# Altium PCB STM32WLE5CBU6 dev board.PcbDoc (part 1 of 2)
Units mm, origin at the board's own origin, x right, y up, seen from the top; angles counter-clockwise.
Board outline 20 x 45 mm, 2 copper layers (Top Layer, Bottom Layer), stack 1.569 mm thick; 116 components, 89 nets, 404 pads, 3 vias.
Unrouted connection lines stored in the file: 306.
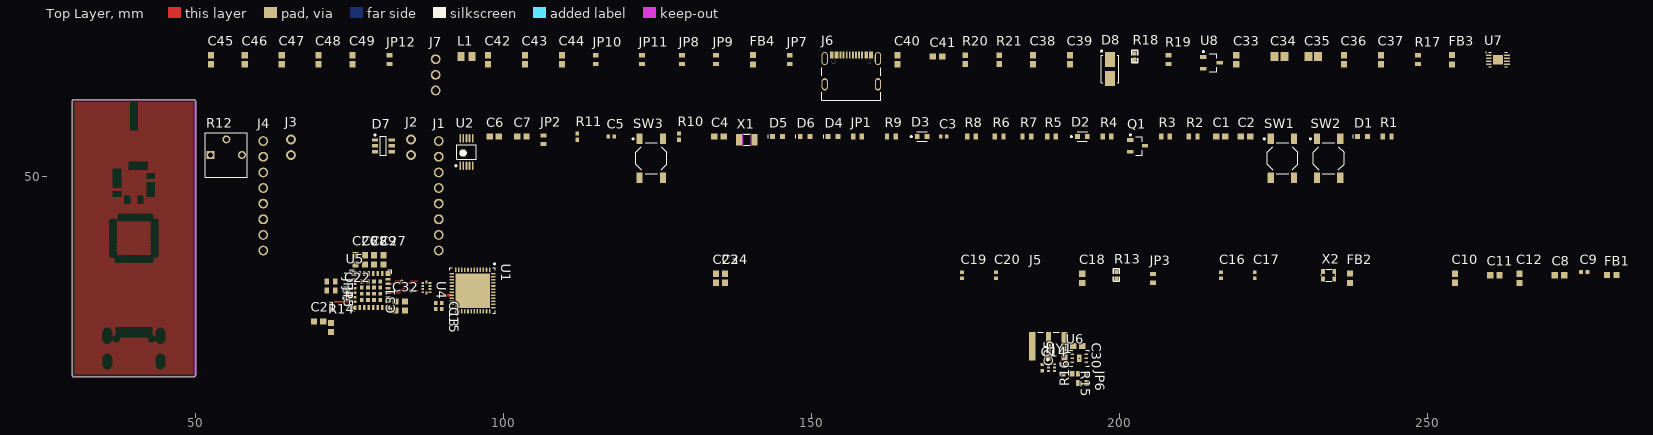
[diagram p0: Top Layer view]
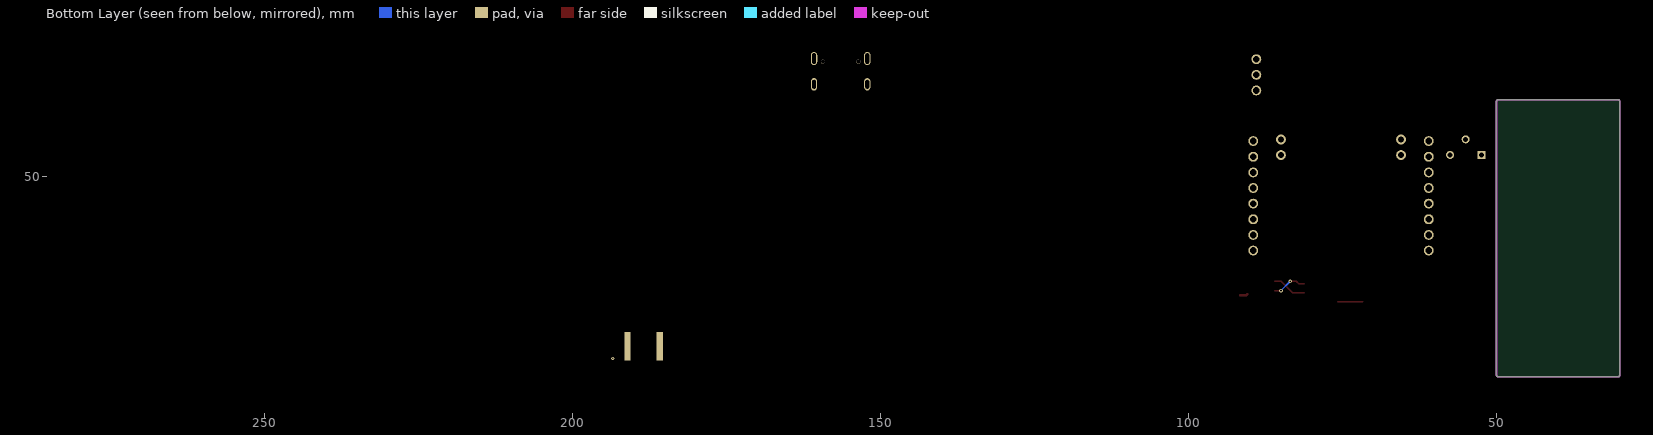
[diagram p1: Bottom Layer view, seen from below]

## Layer stack, top to bottom
Top Solder: solder mask 0.0254, Polyester, Dk 4
Top Layer: signal copper 0.035
Dielectric 1: core 1.4986, FR-4, Dk 4.3
Bottom Layer: signal copper 0.035
Bottom Solder: solder mask 0.0254, Polyester, Dk 4

## Board outline
30,17.754 30,62.246 cw(c30.254,62.246) 30.254,62.5 49.746,62.5 cw(c49.746,62.246) 50,62.246 50,17.754 cw(c49.746,17.754) 49.746,17.5 30.254,17.5 cw(c30.254,17.754)

## Design rules (kind name [scope] priority, off if disabled: settings)
Clearance [All] p1: gap=0.254 ignorepadtopadclearanceinfootprint=FALSE except(0: Arc-Hole Track-Hole SMDPad-Hole THPad-Hole Via-Hole Fill-Hole Poly-Hole Region-Hole Text-Hole)
DiffPairsRouting [All] p1: maxlimit=0.254 minlimit=0.254 mostfreqgap=0.254 toplayer_minwidth=0.381 toplayer_maxwidth=0.381 toplayer_prefwidth=0.381 bottomlayer_minwidth=0.381 bottomlayer_maxwidth=0.381 bottomlayer_prefwidth=0.381 maxuncoupledlength=12.7
HoleSize [All] p1: absolutevalues=TRUE maxlimit=6.3 minlimit=0.2 maxpercent=80.000 minpercent=20.000
PlaneConnect [All] p1: planeconnectstyle=Direct reliefexpansion=0.508 reliefentries=4 reliefconductorwidth=0.254 reliefairgap=0.254
PolygonConnect [All] p1: connectstyle=Direct reliefconductorwidth=0.254 reliefentries=4 polygonreliefangle="90 Angle" airgapwidth=0.254
RoutingVias [All] p1: holewidth=0.2 width=0.45 viastyle="Through Hole" minholewidth=0.2 minwidth=0.45 maxholewidth=0.711 maxwidth=1.27
SolderMaskExpansion [All] p1: expansion=0.102 istentingtop=FALSE
Width [All] p1: maxlimit=0.254 minlimit=0.127 preferedwidth=0.254
27 further rules are at their usual default settings.

## Classes and differential pairs
component class "USB & power": C33 C34 C35 C36 C37 C38 C39 C40 C41 C42 C43 C44 C45 C46 C47 C48 C49 D8 FB3 FB4 J6 J7 JP7 JP8 JP9 JP10 JP11 JP12 L1 R17 R18 R19 R20 R21 U7 U8
component class "STM32WLE5CBU6 dev board": C1 C2 C3 C4 C5 C6 C7 D1 D2 D3 D4 D5 D6 D7 J1 J2 J3 J4 JP1 JP2 Q1 R1 R2 R3 R4 R5 R6 R7 R8 R9 R10 R11 R12 SW1 SW2 SW3 U1 U2 X1
component class "RF frontend": C8 C9 C10 C11 C12 C13 C14 C15 C16 C17 C18 C19 C20 C21 C22 C23 C24 C25 C26 C27 C28 C29 C30 C31 C32 FB1 FB2 HY1 J5 JP3 JP4 JP5 JP6 R13 R14 R15 R16 U4 U5 U6 X2
differential pair RFI: +RFI_P -RFI_N

## Components (designator, comment, footprint, x,y, rotation, side; value= is the part's Value field where it differs from the comment)
C1 "C0603C104M5RACTU" CAPC1608X10N#1 216.5,56.5 r0 top value=100nF
C2 "C0603C104M5RACTU" CAPC1608X10N#1 220.5,56.5 r0 top value=100nF
C3 "GRM1555C1H150JA01D" CAPC1005X05N 171.5,56.5 r0 top value=15pF
C4 "C0603C104M5RACTU" CAPC1608X10N#1 135,56.5 r0 top value=100nF
C5 "GRM1555C1H150JA01D" CAPC1005X05N 117.5,56.5 r0 top value=15pF
C6 "C0603C104M5RACTU" CAPC1608X10N#1 98.5,56.5 r0 top value=100nF
C7 "C0603C104M5RACTU" CAPC1608X10N#1 103,56.5 r0 top value=100nF
C8 "CL10B473KB8NNNC" CAPC1608X10N#1 271.499,34 r0 top value=47nF
C9 "CL05C680JB5NNNC" CAPC1005X06N 275.499,34.5 r0 top value=68pF
C10 "C0603C103J5RACTU" CAPC1608X10N#1 254.499,33.5 r90 top value=10nF
C11 "CC0603CRNPO0BN1R0" CAPC1608X10N#2 260.999,34 r0 top value=1pF
C12 "CC0603CRNPO0BN1R0" CAPC1608X10N#2 264.999,33.5 r90 top value=1pF
C13 "C0402C101J5GAC7411" CAPC1005X05N 89.5,29.5 r0 top value=100pF
C14 "C0402C101J5GAC7411" CAPC1005X05N 187.5,19 r90 top value=100pF
C15 "C0402C101J5GAC7411" CAPC1005X05N 89.5,28.5 r0 top value=100pF
C16 "C0402C101J5GAC7411" CAPC1005X05N 216.5,34 r90 top value=100pF
C17 "C0402C101J5GAC7411" CAPC1005X05N 222,34 r90 top value=100pF
C18 "GRM1885C1H100JA01D" CAPC1608X10N#2 194,33.5 r90 top value=10pF
C19 "GCM1555C1H1R0JA16D" CAPC1005X05N 174.5,34 r90 top value=1pF
C20 "GCM1555C1H1R0JA16D" CAPC1005X05N 180,34 r90 top value=1pF
C21 "C0603C102K5RAC" CAPC1608X10N#2 70,26.5 r0 top value=1nF
C22 "0402B682K500NT" CAPC1005X06N 74.5,31 r90 top value=6.8nF
C23 "C0603C104M5RACTU" CAPC1608X10N#1 134.5,33.5 r90 top value=100nF
C24 "C0603C104M5RACTU" CAPC1608X10N#1 136,33.5 r90 top value=100nF
C25 "C0402C101J5GAC7411" CAPC1005X05N 191,19.5 r180 top value=100pF
C26 "CL10B473KB8NNNC" CAPC1608X10N#1 76,36.5 r90 top value=47nF
C27 "0603B472K500NT" CAPC1608X10N#2 80.5,36.5 r90 top value=4.7nF
C28 "C0603C471J1RACTU" CAPC1608X10N#2 77.5,36.5 r90 top value=470pF
C29 "CL10B221KB8NNNC" CAPC1608X10N#2 79,36.5 r90 top value=220pF
C30 "C0603C104M5RACTU" CAPC1608X10N#1 193.25,22.5 r0 top value=100nF
C31 "C0603C471J1RACTU" CAPC1608X10N#2 84,29 r90 top value=470pF
C32 "CL10B221KB8NNNC" CAPC1608X10N#2 82.5,29 r90 top value=220pF
C33 "C0603C104M5RACTU" CAPC1608X10N#1 219,69 r90 top value=100nF
C34 "C0805C106K8PACTU" CAPC2012X14N 226,69.5 r0 top value=10uF
C35 "C0805C106K8PACTU" CAPC2012X14N 231.5,69.5 r0 top value=10uF
C36 "C0603C105K4RACTU" CAPC1608X10N#1 236.5,69 r90 top value=1uF
C37 "C0603C105K4RACTU" CAPC1608X10N#1 242.5,69 r90 top value=1uF
C38 "C0603C475K9PACTU" CAPC1608X10N#1 186,69 r90 top value=4.7uF
C39 "C0603C104M5RACTU" CAPC1608X10N#1 192,69 r90 top value=100nF
C40 "C0603C104M5RACTU" CAPC1608X10N#1 164,69 r90 top value=100nF
C41 "C0603C475K9PACTU" CAPC1608X10N#1 170.5,69.5 r0 top value=4.7uF
C42 "C0603C475K9PACTU" CAPC1608X10N#1 97.5,69 r90 top value=4.7uF
C43 "C0603C104M5RACTU" CAPC1608X10N#1 103.5,69 r90 top value=100nF
C44 "C0603C103J5RACTU" CAPC1608X10N#1 109.5,69 r90 top value=10nF
C45 "C0603C475K9PACTU" CAPC1608X10N#1 52.5,69 r90 top value=4.7uF
C46 "C0603C104M5RACTU" CAPC1608X10N#1 58,69 r90 top value=100nF
C47 "C0603C104M5RACTU" CAPC1608X10N#1 64,69 r90 top value=100nF
C48 "C0603C104M5RACTU" CAPC1608X10N#1 70,69 r90 top value=100nF
C49 "CL10B474KA8NNNC" CAPC1608X10N#1 75.5,69 r90 top value=470nF
D1 "150060RS75000" 0603_A 239.5,56.5 r0 top
D2 "LTST-C191TBKT" FP-150060GS75000-MFG 194,56.5 r0 top
D3 "150060GS75000" FP-150060GS75000-MFG 168,56.5 r0 top
D4 "150060RS75000" 0603_A 153.5,56.5 r0 top
D5 "150060RS75000" 0603_A 144.5,56.5 r0 top
D6 "150060RS75000" 0603_A 149,56.5 r0 top
D7 "SRV05-4-P-T7" SOT95P280X145-6N 80.5,55 r0 top value=3.5pF
D8 "SS54" DIOM4226X20N 198.5,67.5 r90 top
FB1 "PE-0603PFB121ST" INDC1608X10N 279.999,34 r0 top value=120R
FB2 "PE-0603PFB121ST" INDC1608X10N 237.5,33.5 r90 top value=120R
FB3 "PE-0603PFB121ST" INDC1608X10N 253.999,69 r90 top value=120R
FB4 "PE-0603PFB121ST" INDC1608X10N 140.5,69 r90 top value=120R
HY1 "HHM22139A2" SOTFL55P150X70-6N 189,19 r0 top
J1 "22-28-4080" 22-28-4080-Footprint-1 89.5,38 r90 top
J2 "22-28-4020" 22-28-4020-Footprint-1 85,53.5 r90 top
J3 "22-28-4020" 22-28-4020-Footprint-1 65.5,53.5 r90 top
J4 "22-28-4080" 22-28-4080-Footprint-1 61,38 r90 top
J5 "EMPCB.SMAFSTJ.B.HT" FP-EMPCB_SMAFSTJ_B_HT-MFG 188.5,29.5 r0 top
J6 "USB4105-GF-A" GCT_USB4105-GF-A 156.5,65 r0 top
J7 "10129378-903001BLF" 10129378-903001BLF-Footprint-1 89,64 r90 top
JP1 "RC0603FR-070RL" RESC1608X05N 157.5,56.5 r0 top
JP2 "RC0603FR-070RL" RESC1608X05N 106.5,56 r90 top
JP3 "RC0603FR-070RL" RESC1608X05N 205.5,33.5 r90 top
JP4 "RC0603FR-070RL" RESC1608X05N 72,33 r0 top
JP5 "RC0603FR-070RL" RESC1608X05N 72,31.5 r0 top
JP6 "RC0603FR-070RL" RESC1608X05N 194,18 r0 top
JP7 "RC0603FR-070RL" RESC1608X05N 146.5,69 r90 top
JP8 "RC0603FR-070RL" RESC1608X05N 129,69 r90 top
JP9 "RC0603FR-070RL" RESC1608X05N 134.5,69 r90 top
JP10 "RC0603FR-070RL" RESC1608X05N 115,69 r90 top
JP11 "RC0603FR-070RL" RESC1608X05N 122.5,69 r90 top
JP12 "RC0603FR-070RL" RESC1608X05N 81.5,69 r90 top
L1 "MLZ2012M150WT000" INDC2012X14N 94,69.5 r0 top value=15uH
Q1 "SI2301CDS-T1-GE3" SOT95P237X112-3N 203,55 r0 top
R1 "RC0603FR-071KL" RESC1608X05N 243.5,56.5 r0 top value=1k
R2 "RC0603FR-07100KL" RESC1608X05N 212,56.5 r0 top value=100k
R3 "CRCW060333R0FKEAC" RESC1608X05N 207.5,56.5 r0 top value=33R
R4 "CRCW06034K70FKEAC" RESC1608X05N 198,56.5 r0 top value=4.7kR
R5 "RC0603FR-071KL" RESC1608X05N 189,56.5 r0 top value=1k
R6 "RC0603FR-071KL" RESC1608X05N 180.5,56.5 r0 top value=1k
R7 "RC0603FR-071KL" RESC1608X05N 185,56.5 r0 top value=1k
R8 "RK73B1JTTD152J" RESC1608X05N 176,56.5 r0 top value=1.5k
R9 "RC0603FR-071KL" RESC1608X05N 163,56.5 r0 top value=1k
R10 "0402WGF220JTCE" RESC1005X04N 128.5,56.5 r90 top value=22R
R11 "0402WGF220JTCE" RESC1005X04N 112,56.5 r90 top value=22R
R12 "3362P-1-254LF" 3362P-1-502LF-Footprint-1 55,50 r0 top value=250k
R13 "0402WGF2200TCE" RESC1005X04N 199.5,34 r90 top value=220R
R14 "CRCW0603100RFKEAC" RESC1608X06N 72,25.5 r90 top value=100R
R15 "CRCW060310K0FKEA" RESC1608X06N 191.5,18 r0 top value=10k
R16 "RC0603FR-07100KL" RESC1608X05N 194,16.5 r180 top value=100k
R17 "ERJ3EKF4702V" RESC1608X05N 248.5,69 r90 top value=47k
R18 "ERJ-PA2J100X" RESC1005X04N 202.5,69.5 r90 top value=10R
R19 "CRCW06038K20JNEAC" RESC1608X05N 208,69 r90 top value=8k2
R20 "CRCW06035K10FKEA" RESC1608X06N 175,69 r90 top value=5.1k
R21 "CRCW06035K10FKEA" RESC1608X06N 180.5,69 r90 top value=5.1k
SW1 "TL3342F160QG" ESWI-TL3342F160QG_V 226.5,53 r0 top
SW2 "TL3342F160QG" ESWI-TL3342F160QG_V 234,53 r0 top
SW3 "TL3342F160QG" ESWI-TL3342F160QG_V 124,53 r0 top
U1 "STM32WLE5CBU6" QFN50P700X700X60_HS-49L 95,31.5 r270 top
U2 "CH340E" TSSOP50P490X110-10N 94,54 r90 top
U4 "3" 0900FM15K0039001E-Footprint-1 87.5,32 r270 top
U5 "SKY65313-21" QFN75P600X600X100_HS-25N 78.5,31.5 r0 top
U6 "LMV228SD/NOPB" NGF0006A_V 193.5,20.5 r0 top
U7 "AP7363-HA-7" SON50P300X63_HS-9M 261.499,69 r0 top
U8 "XC6206P332MR" SOT95P280X120-3N 215,68.5 r0 top
X1 "Q13FC1350000400" Q13FC1350000400-Footprint-1 139.5,56 r0 top value=32.768kHz
X2 "ECS-TXO-20CSMV4-320-AY-TR" ECS-TXO-20CSMV4-320-AY-TR-Footprint-1 234,34 r0 top

## Footprints (in the part's own frame and the unit in brackets; to place one, negate y for a bottom-side part, rotate by r counter-clockwise, add the part's x,y. Pads: shape width x height; smd on the part's side, far side on the other; paste and mask are expansions set on the pad)
22-28-4020-Footprint-1 [mm]
  round 1.6 hole 1: 1(0,0) 2(2.54,0)
  body extent -1.27,-1.27 3.81,1.23, height 8.38
22-28-4080-Footprint-1 [mm]
  round 1.6 hole 1.1: 1(0,0) 2(2.54,0) 3(5.08,0) 4(7.62,0) 5(10.16,0) 6(12.7,0) 7(15.24,0) 8(17.78,0)
  body extent -1.27,-1.24 19.05,1.24, height 7.24
0603_A [mm] "Chip LED, 2-Leads, Body 1.6x0.8mm, IPC Medium Density"
  rect 0.8x0.8 smd: 1(-0.8,0) 2(0.8,0)
  silkscreen extent -1.5,-0.3 -1.5,0.3, body extent -0.8,-0.4 0.8,0.4, height 0.7
0900FM15K0039001E-Footprint-1 [mm]
  rect 0.275x0.45 smd: 1(0.75,0.6) 2(0.25,0.6) 3(-0.25,0.6) 4(-0.75,0.6) 6(-0.75,-0.6) 7(-0.25,-0.6) 8(0.25,-0.6) 9(0.75,-0.6)
  rect 0.5x0.375 smd: 5(-0.9,0) 10(0.9,0)
  body extent -1,-0.63 1,0.63, height 0.81
3362P-1-502LF-Footprint-1 [mm]
  rect 1.3x1.3 hole 0.8: 1(-2.54,3.53)
  round 1.3 hole 0.8: 2(0,6.071) 3(2.54,3.53)
  silkscreen extent -3.4,-0.1 3.4,7.1, body extent -3.3,0 3.3,6.98, height 4.75
10129378-903001BLF-Footprint-1 [mm]
  round 1.6 hole 1.1: 1(0,0) 2(2.54,0) 3(5.08,0)
  body extent -1.27,-1.23 6.35,1.27, height 8.38
CAPC1005X05N [mm] "Chip Capacitor, 2-Leads, Body 1.00x0.50mm, IPC Medium Density"
  rect 0.54x0.64 smd: 1(-0.5,0) 2(0.5,0)
  body extent -0.5,-0.25 0.5,0.25, height 0.5
CAPC1005X06N [mm] "Chip Capacitor, 2-Leads, Body 1.00x0.50mm, IPC Medium Density"
  rect 0.66x0.62 smd: 1(-0.508,0) 2(0.508,0)
  body extent -0.53,-0.28 0.53,0.28, height 0.55
CAPC1608X10N#1 [mm] "Chip Capacitor, 2-Leads, Body 1.60x0.80mm, IPC Medium Density"
  rect 1.05x1 smd: 1(-0.75,0) 2(0.75,0)
  body extent -0.87,-0.48 0.87,0.48, height 0.95
CAPC1608X10N#2 [mm] "Chip Capacitor, 2-Leads, Body 1.60x0.80mm, IPC Medium Density"
  rect 1x1 smd: 1(-0.75,0) 2(0.75,0)
  body extent -0.87,-0.48 0.87,0.48, height 0.95
CAPC2012X14N [mm] "Chip Capacitor, 2-Leads, Body 2.00x1.25mm, IPC Medium Density"
  rect 1.3x1.45 smd: 1(-0.8,0) 2(0.8,0)
  body extent -1.1,-0.72 1.1,0.72, height 1.45
DIOM4226X20N [mm] "Molded Diode, 2-Leads, Body 4.25x2.55mm, IPC Medium Density"
  rect 2.4x1.6 smd: 1(-1.55,0) 2(1.55,0)
  silkscreen extent -2.25,-1.4 3.02,1.47, body extent -2.47,-1.4 2.47,1.4, height 1.98
ECS-TXO-20CSMV4-320-AY-TR-Footprint-1 [mm]
  rect 0.63x0.825 smd: 1(-0.91,-0.613) 2(0.91,-0.613) 3(0.91,0.613) 4(-0.91,0.613)
  silkscreen extent -1.17,-0.98 1.17,0.98, body extent -1,-0.8 1,0.8, height 0.8
ESWI-TL3342F160QG_V [mm] "SMD, 4-Leads, Body 5x5mm, Pitch 6.3mm"
  rect 1x1.7 smd: 1(-1.9,3.15) 2(-1.9,-3.15) 3(1.9,3.15) 4(1.9,-3.15)
  silkscreen extent -3.07,-2.5 2.5,3.27, body extent -2.5,-3.3 2.5,3.3, height 1.5
FP-150060GS75000-MFG [mm]
  rect 0.8x0.8 smd paste+0 mask+0: 1(-0.8,0) 2(0.8,0)
  silkscreen extent -1.9,-0.78 0.85,0.77, body extent -1.3,-0.55 1.3,0.55, height 0.25
FP-EMPCB_SMAFSTJ_B_HT-MFG [mm]
  rect 0.85x4.56 smd paste+0: 1(0,-7.03)
  rect 1x4.56 smd paste+0: 2(-2.62,-7.03) 3(2.62,-7.03)
  rect 1x4.56 smd far side paste+0 mask+0: 4(-2.62,-7.03) 5(2.62,-7.03)
  silkscreen extent -1.75,-4.75 1.75,-4.75, body extent -3.17,-8.45 3.22,4.85, height 3.55
GCT_USB4105-GF-A [mm]
  oval 1x2 hole 0.6 slot 1.4 at 90 deg: 0(-4.32,0) 0(4.32,0)
  oval 1.05x2.1 hole 0.6 slot 1.7 at 90 deg: 0(-4.32,4.18) 0(4.32,4.18)
  round 0.65 hole 0.65 unplated: 0(-2.89,3.68) 0(2.89,3.68)
  rect 0.3x1.15 smd: 1A(-3.35,4.755) 1B(3.05,4.755) 4A(-2.55,4.755) 4B(2.25,4.755) 5A(-1.25,4.755) 5B(1.75,4.755) 6A(-0.25,4.755) 6B(0.75,4.755) 7A(0.25,4.755) 7B(-0.75,4.755) 8A(1.25,4.755) 8B(-1.75,4.755) 9A(2.55,4.755) 9B(-2.25,4.755) 12A(3.35,4.755) 12B(-3.05,4.755)
  silkscreen extent -4.79,-2.6 4.79,2.65, body extent -4.79,-2.6 4.79,5.11, height 3.31
INDC1608X10N [mm] "Chip Inductor, 2-Leads, Body 1.60x0.80mm, IPC Medium Density"
  rect 0.97x0.98 smd: 1(-0.77,0) 2(0.77,0)
  body extent -0.87,-0.48 0.87,0.48, height 0.95
INDC2012X14N [mm] "Chip Inductor, 2-Leads, Body 2.00x1.25mm, IPC Medium Density"
  rect 1.11x1.47 smd: 1(-0.9,0) 2(0.9,0)
  body extent -1.1,-0.72 1.1,0.72, height 1.45
NGF0006A_V [mm] "SON, 6-Leads, Body 2.2x2.5mm, Pitch 0.65mm, NSC Recommended (SC-70 Land)"
  rrect40% 0.6x0.25 smd paste-0.125 mask+0.051: 1(-1.15,0.65) 2(-1.15,0) 3(-1.15,-0.65) 4(1.15,-0.65) 5(1.15,0) 6(1.15,0.65)
  rrect13% 0.75x1.2 smd paste-0.6 mask+0.051: 7(0,0)
  silkscreen extent -2.27,-1.3 1.6,1.45, body extent -1.3,-1.15 1.3,1.15, height 0.8
Q13FC1350000400-Footprint-1 [mm]
  rect 1x1.8 smd: 1(-1.25,0) 2(1.25,0)
  Top Layer keep-out region: -0.75,-0.9 0.75,-0.9 0.75,0.9 -0.75,0.9
  silkscreen extent -0.5,-0.9 0.5,0.9, body extent -1.6,-0.75 1.6,0.75, height 0.91
QFN50P700X700X60_HS-49L [mm] "QFN, 48-Leads, Body 7.00x7.00mm, Pitch 0.50mm, Thermal Pad 5.60x5.60mm, IPC High Density"
  oval 0.75x0.25 smd: 1(-3.375,2.75) 2(-3.375,2.25) 3(-3.375,1.75) 4(-3.375,1.25) 5(-3.375,0.75) 6(-3.375,0.25) 7(-3.375,-0.25) 8(-3.375,-0.75) 9(-3.375,-1.25) 10(-3.375,-1.75) 11(-3.375,-2.25) 12(-3.375,-2.75) 25(3.375,-2.75) 26(3.375,-2.25) 27(3.375,-1.75) 28(3.375,-1.25) 29(3.375,-0.75) 30(3.375,-0.25) 31(3.375,0.25) 32(3.375,0.75) 33(3.375,1.25) 34(3.375,1.75) 35(3.375,2.25) 36(3.375,2.75)
  oval 0.25x0.75 smd: 13(-2.75,-3.375) 14(-2.25,-3.375) 15(-1.75,-3.375) 16(-1.25,-3.375) 17(-0.75,-3.375) 18(-0.25,-3.375) 19(0.25,-3.375) 20(0.75,-3.375) 21(1.25,-3.375) 22(1.75,-3.375) 23(2.25,-3.375) 24(2.75,-3.375) 37(2.75,3.375) 38(2.25,3.375) 39(1.75,3.375) 40(1.25,3.375) 41(0.75,3.375) 42(0.25,3.375) 43(-0.25,3.375) 44(-0.75,3.375) 45(-1.25,3.375) 46(-1.75,3.375) 47(-2.25,3.375) 48(-2.75,3.375)
  rect 5.6x5.6 smd: 49(0,0)
  silkscreen extent -4.47,-3.7 3.7,3.7, body extent -3.55,-3.55 3.55,3.55, height 0.6
QFN75P600X600X100_HS-25N [mm] "QFN, 24-Leads, Body 6.00x6.00mm, Pitch 0.75mm, Thermal Pad 3.88x3.88mm, IPC Medium Density"
  rect 0.8x0.75 smd: 1(-2.751,2.776) 8(-2.751,-2.774) 15(2.749,-2.774) 22(2.749,2.776)
  rect 0.8x0.4 smd: 2(-2.751,1.814) 3(-2.751,1.089) 4(-2.751,0.364) 5(-2.751,-0.361) 6(-2.751,-1.087) 7(-2.751,-1.812) 16(2.749,-1.812) 17(2.749,-1.087) 18(2.749,-0.361) 19(2.749,0.364) 20(2.749,1.089) 21(2.749,1.814)
  rect 0.4x0.8 smd: 9(-1.814,-2.749) 10(-1.089,-2.749) 11(-0.364,-2.749) 12(0.362,-2.749) 13(1.087,-2.749) 14(1.811,-2.749) 23(1.811,2.751) 24(1.087,2.751) 25(0.362,2.751) 26(-0.364,2.751) 27(-1.089,2.751) 28(-1.814,2.751)
  rect 0.625x0.625 smd: 29(-1.503,-1.501) 29(-1.503,-0.5) 29(-1.503,0.502) 29(-1.503,1.503) 29(-0.502,-1.501) 29(-0.502,-0.501) 29(-0.502,0.502) 29(-0.502,1.503) 29(0.5,-1.501) 29(0.5,-0.5) 29(0.5,0.502) 29(0.5,1.503) 29(1.5,-1.501) 29(1.5,-0.5) 29(1.5,0.502) 29(1.5,1.503)
  silkscreen extent -4.22,-3.39 3.39,3.39, body extent -3,-3 3,3, height 1
RESC1005X04N [mm] "Chip Resistor, 2-Leads, Body 1.00x0.50mm, IPC Medium Density"
  rect 0.66x0.62 smd: 1(-0.508,0) 2(0.508,0)
  body extent -0.53,-0.28 0.53,0.28, height 0.4
RESC1608X05N [mm] "Chip Resistor, 2-Leads, Body 1.58x0.85mm, IPC Medium Density"
  rect 0.7x0.95 smd: 1(-0.7,0) 2(0.7,0)
  body extent -0.82,-0.48 0.82,0.48, height 0.5
RESC1608X06N [mm] "Chip Resistor, 2-Leads, Body 1.60x0.80mm, IPC Medium Density"
  rect 0.95x0.9 smd: 1(-0.725,0) 2(0.725,0)
  body extent -0.85,-0.45 0.85,0.45, height 0.55
SON50P300X63_HS-9M [mm] "SON, 8-Leads, Body 2.00x3.00mm, Pitch 0.50mm, Thermal Pad 1.50x1.60mm, IPC Low Density"
  rect 0.9x0.25 smd: 1(-1.465,0.75) 2(-1.465,0.25) 3(-1.465,-0.25) 4(-1.465,-0.75) 5(1.465,-0.75) 6(1.465,-0.25) 7(1.465,0.25) 8(1.465,0.75)
  rect 1.6x1.5 smd: 9(0,0)
  silkscreen extent -1.97,-1.17 1.52,1.22, body extent -1.53,-1.02 1.53,1.02, height 0.63
SOT95P237X112-3N [mm] "SOT23, 3-Leads, Body 2.92x2.37mm, Pitch 0.95mm, IPC Medium Density"
  rect 1x0.6 smd: 1(-1.2,0.95) 2(-1.2,-0.95) 3(1.2,0)
  silkscreen extent -1.32,-1.5 0.7,1.92, body extent -1.32,-1.52 1.32,1.52, height 1.12
SOT95P280X120-3N [mm] "SOT23, 3-Leads, Body 2.90x2.80mm, Pitch 0.95mm, IPC Medium Density"
  rect 1.05x0.6 smd: 1(-1.325,0.95) 2(-1.325,-0.95) 3(1.325,0)
  silkscreen extent -1.45,-1.45 0.8,1.92, body extent -1.4,-1.45 1.4,1.45, height 1.2
SOT95P280X145-6N [mm] "SOT23, 6-Leads, Body 2.93x2.80mm, Pitch 0.95mm, IPC Medium Density"
  rect 1x0.55 smd: 1(-1.375,0.95) 2(-1.375,0) 3(-1.375,-0.95) 4(1.375,-0.95) 5(1.375,0) 6(1.375,0.95)
  silkscreen extent -1.5,-1.55 0.5,1.9, body extent -1.5,-1.53 1.5,1.53, height 1.45
SOTFL55P150X70-6N [mm] "SOTFL, 6-Leads, Body 1.60x1.50mm, Pitch 0.55mm, IPC Medium Density"
  rect 0.5x0.3 smd: 1(-0.5,0.55) 2(-0.5,0) 3(-0.5,-0.55) 4(0.5,-0.55) 5(0.5,0) 6(0.5,0.55)
  silkscreen extent -0.77,1.15 -0.53,1.4, body extent -0.75,-0.85 0.75,0.85, height 0.7
TSSOP50P490X110-10N [mm] "TSSOP, 10-Leads, Body 3.00x3.00mm, Pitch 0.50mm, IPC Medium Density"
  oval 1.35x0.26 smd: 1(-2.225,1) 2(-2.225,0.5) 3(-2.225,0) 4(-2.225,-0.5) 5(-2.225,-1) 6(2.225,-1) 7(2.225,-0.5) 8(2.225,0) 9(2.225,0.5) 10(2.225,1)
  silkscreen extent -2.35,-1.55 1.15,1.85, body extent -2.45,-1.55 2.45,1.55, height 1.1

## Part data
C1 C2 C4 C6 C7 C23 C24 C30 C33 C39 C40 C43 C46 C47 C48: library part CMP-00038-5, "Cap Ceramic 0.1uF 50V X7R 20% SMD 0603 125C T/R", Capacitance=100nF, Case Code (Imperial)=0603, Case Code (Metric)=1608, Dielectric=X7R, Dielectric Material=Ceramic, JLC_PN=C14663, Max Operating Temperature=125°C, Min Operating Temperature=-55°C, Package Quantity=1, Tolerance=20%, Voltage Rating=50V, Case/Package=0603, Contact Plating=Tin,Matte, Depth=0.8mm, Dissipation Factor=2.5%, Height=0.8mm, Lead Pitch=0.7mm, Length=1.6mm, Mount="Surface Mount,PCB", Packaging="Tape and Reel", Radiation Hardening=No, REACH SVHC="No SVHC", Termination=SMD/SMT, Thickness=0.034inch, Voltage Rating (DC)=50V, Width=0.031inch
C3 C5: library part CMP-00073-1, "CAP CER 15PF 50V C0G/NP0 0402", Capacitance=15pF, Case Code (Imperial)=0402, Case Code (Metric)=1005, Dielectric=C0G, Max Operating Temperature=125°C, Min Operating Temperature=-55°C, Package Quantity=1, Temperature Coefficient=30ppm/°C, Tolerance=5%, Voltage=50V, Case/Package=0402, Depth=0.5mm, Height=0.5mm, Lead Free="Lead Free", Length=1mm, Material=Ceramic, Mount="Surface Mount", Packaging="Tape and Reel", Radiation Hardening=No, REACH SVHC="No SVHC", Termination=SMD/SMT, Thickness=0.022inch, Voltage Rating=50V, Voltage Rating (DC)=50V, Width=0.5mm
C8 C26: library part CMP-00130-2, "Prices include import duty and tax. CAP, 0.047UF, 50V, MLCC, 0603; SVHC: No SVHC (15-Jan-2019)", Case Code (Imperial)=0603, Case Code (Metric)=1608, Dielectric=Y5V, JLC_PN=C1622, Max Operating Temperature=125°C, Min Operating Temperature=-55°C, Package Quantity=1, Tolerance=10%, Voltage=50V, Case/Package=0603, Construction=Flat, Depth=0.8mm, Height=0.8mm, Lead Free="Lead Free", Length=1.6mm, Material=Ceramic, Mounting Technology="Surface Mount", Packaging="Tape and Reel", Radiation Hardening=No, RoHS Compliant=Yes, Series=CL, Thickness=0.035inch, Voltage Rating=50V, Voltage Rating (DC)=50V, Width=0.031inch
C9: library part CMP-00621-1, "Ceramic capacitor SMD-0402 68pF /50V C0G# J +-5%, Samsung, RoHS", Case Code (Imperial)=0402, Case Code (Metric)=1005, Dielectric=C0G, JLC_PN=C14441, Max Operating Temperature=125°C, Min Operating Temperature=-55°C, Temperature Coefficient=300ppm/°C, Tolerance=5%, Voltage=50V, Case/Package=0402, Construction=Flat, Depth=0.5mm, Height=0.5mm, Lead Free="Lead Free", Length=1mm, Material=Ceramic, Mounting Technology="Surface Mount", Packaging="Tape and Reel", Radiation Hardening=No, RoHS Compliant=Yes, Series=CL, Voltage Rating=50V, Voltage Rating (DC)=50V
C10 C44: library part CMP-00047-2, "Cap Ceramic 0.01uF 50V X7R 5% SMD 0603 125C Paper T/R", Capacitance=10nF, Case/Package=0603, Dielectric=X7R, JLC_PN=C57112, Max Operating Temperature=125°C, Min Operating Temperature=-55°C, Tolerance=5%, Depth=0.8mm, Height=0.8mm, Length=1.6mm, Mount="Surface Mount", Packaging="Tape and Reel", Radiation Hardening=No
C11 C12: library part CMP-00536-1, "0603 1 pF 100 V ±0.25 pF Tolerance NP0 SMT Multilayer Ceramic Capacitor", Case Code (Imperial)=0603, Case Code (Metric)=1608, Dielectric=C0G, Max Operating Temperature=125°C, Min Operating Temperature=-55°C, Resistor Type=Ceramic, Voltage Rating=100V, Case/Package=0603, Construction=Flat, Depth=0.8mm, Height=0.8mm, Lead Free="Lead Free", Length=0.063inch, Mounting Technology="Surface Mount", Packaging="Tape and Reel", Radiation Hardening=No, Series=CC, Termination=SMD/SMT, Thickness=0.035inch, Voltage Rating (DC)=100V, Weight=7.1E-05oz, Width=0.031inch
C13 C14 C15 C16 C17 C25: library part CMP-00082-3, "Cap Ceramic 100pF 50V C0G 5% SMD 0402 125C Paper T/R", Case/Package=0402, JLC PN=C1546, Voltage Rating (DC)=50V
C18: library part CMP-00381-2, "0603 10pF 50V ±5 % Tolerance C0G SMT Multilayer Ceramic Capacitor", Capacitance=10pF, Case Code (Imperial)=0603, Case Code (Metric)=1608, Dielectric=C0G, Dielectric Material=Ceramic, Insulation Resistance=10GR, JLC_PN=C1634, Max Operating Temperature=125°C, Min Operating Temperature=-55°C, Package Quantity=1, Temperature Coefficient=30ppm/°C, Tolerance=5%, Voltage=50V, Case/Package=0603, Construction=Flat, Depth=0.8mm, Height=0.8mm, Lead Free="Lead Free", Length=1.6mm, Material=Ceramic, Mount="Surface Mount", Mounting Technology="Surface Mount", Number of Pins=2, Packaging="Tape and Reel", Radiation Hardening=No, REACH SVHC="No SVHC", RoHS Compliant=Yes, Series=GRM, Size=0.8mm, Termination=SMD/SMT, Thickness=0.035inch, Voltage Rating=50V, Voltage Rating (DC)=50V, Width=0.031inch
C19 C20: library part CMP-00086-1, "Cap Ceramic 1pF 50V C0G 5% Pad SMD 0402 125C Automotive T/R"
C21: library part CMP-002-000001-2, "Cap Ceramic 0.001uF 50V X7R 10% SMD 0603 125°C Bulk", Capacitance=1nF, Case Code (Imperial)=0603, Case Code (Metric)=1608, Dielectric=X7R, Max Operating Temperature=125°C, Min Operating Temperature=-55°C, Package Quantity=4000, Tolerance=10%, Voltage=50V, Case/Package=0603, Component Type=Standard, Construction=Flat, Depth=0.8mm, Design Item ID=C0603C102K5RAC, Dissipation Factor=2.5%, Height=0.8mm, Lead Free="Lead Free", Lead Pitch=0.7mm, Length=1.6mm, Material=Ceramic, Mounting Technology="Surface Mount", Packaging="Tape and Reel", Pin Count=2, Radiation Hardening=No, RoHS Compliant=Yes, Series=C0603C, Source=BMS_LIB.SchLib, Termination=SMD/SMT, Thickness=0.035inch, Voltage Rating=50V, Voltage Rating (DC)=50V, Width=0.8mm
C22: library part CMP-00615-1, "50V 6.8nF X7R ±10% 0402 Multilayer Ceramic Capacitors MLCC - SMD/SMT ROHS", JLC_PN=C1542
C27: library part CMP-00614-1, "50V 4.7nF X7R ±10% 0603  Multilayer Ceramic Capacitors MLCC - SMD/SMT ROHS", JLC_PN=C53987
C28 C31: library part CMP-00313-1, "Cap Ceramic 470pF 100V X7R 5% SMD 0603 125°C Paper T/R", Capacitance=470pF, Case Code (Imperial)=0603, Case Code (Metric)=1608, Dielectric=X7R, Dielectric Material=Ceramic, Max Operating Temperature=125°C, Min Operating Temperature=-55°C, Package Quantity=4000, Tolerance=5%, Voltage Rating=100V, Case/Package=0603, Construction=Flat, Depth=0.8mm, Height=0.8mm, Length=1.6mm, Mount="Surface Mount", Packaging="Tape and Reel", Radiation Hardening=No, REACH SVHC="No SVHC", RoHS Compliant=Yes, Series=C, Termination=SMD/SMT, Thickness=0.034inch, Voltage Rating (DC)=100V, Weight=7.1E-05oz, Width=0.031inch
C29 C32: library part CMP-00612-1, "CAP CER 220PF 50V X7R 0603", Case Code (Imperial)=0603, Case Code (Metric)=1608, Dielectric=X7R, JLC_PN=C1603, Max Operating Temperature=125°C, Min Operating Temperature=-55°C, Tolerance=10%, Voltage=50V, Case/Package=0603, Construction=Flat, Depth=0.8mm, Height=0.8mm, Length=1.6mm, Material=Ceramic, Mounting Technology="Surface Mount", Packaging="Tape and Reel", Radiation Hardening=No, RoHS Compliant=Yes, Series=CL, Thickness=0.035inch, Voltage Rating=50V, Width=0.031inch
C34 C35: library part CMP-00046-3, "CAP CER 10UF 10V X5R 0805", Capacitance=10uF, Case Code (Imperial)=0805, Case Code (Metric)=2012, Dielectric=X5R, Dielectric Material=Ceramic, JLC_PN=C15850, Max Operating Temperature=85°C, Min Operating Temperature=-55°C, Package Quantity=1, Tolerance=10%, Voltage=10V, Case/Package=0805, Contact Plating=Tin,Matte, Depth=1.25mm, Dissipation Factor=10%, Height=1.25mm, Length=2mm, Mount="Surface Mount", Number of Pins=2, Packaging="Tape and Reel", Radiation Hardening=No, REACH SVHC="No SVHC", Termination=SMD/SMT, Thickness=0.055inch, Voltage Rating=10V, Voltage Rating (DC)=10V, Width=1.2mm
C36 C37: library part CMP-00161-2, "KEMET - C0603C105K4RACTU - SMD Multilayer Ceramic Capacitor, 1 µF, 16 V, 0603 [1608 Metric], ± 10%, X7R, C Series KEMET", Capacitance=1uF, Case Code (Imperial)=0603, Case Code (Metric)=1608, Dielectric=X7R, Dielectric Material=Ceramic, JLC_PN=C15849, Max Operating Temperature=125°C, Min Operating Temperature=-55°C, Package Quantity=4000, Tolerance=10%, Voltage=16V, Case/Package=0603, Contact Plating=Tin,Matte, Depth=0.8mm, Dissipation Factor=3.5%, Height=0.8mm, Length=1.6mm, Mount="Surface Mount,PCB", Number of Pins=2, Packaging="Tape and Reel", Radiation Hardening=No, REACH SVHC="No SVHC", Termination=SMD/SMT, Thickness=0.034inch, Voltage Rating=16V, Voltage Rating (DC)=16V, Width=0.031inch
C38 C41 C42 C45: library part CMP-00044-2, "KEMET - C0603C475K9PACTU - SMD Multilayer Ceramic Capacitor, 4.7 µF, 6.3 V, 0603 [1608 Metric], ± 10%, X5R, C Series KEMET", Capacitance=4.7uF, Case Code (Imperial)=0603, Case Code (Metric)=1608, Dielectric=X5R, Dielectric Material=Ceramic, JLC_PN=C19666, Max Operating Temperature=85°C, Min Operating Temperature=-55°C, Package Quantity=1, Tolerance=10%, Voltage=6.3V, Case/Package=0603, Construction=Flat, Contact Plating=Tin,Matte, Depth=0.8mm, Dissipation Factor=5%, Height=0.8mm, Lead Free="Lead Free", Lead Pitch=0.7mm, Length=1.6mm, Material=Ceramic, Mount="Surface Mount,PCB", Mounting Technology="Surface Mount", Number of Pins=2, Packaging="Tape and Reel", Radiation Hardening=No, REACH SVHC="No SVHC", Series=CL, Termination=SMD/SMT, Thickness=0.035inch, Voltage Rating=6.3V, Voltage Rating (DC)=6.3V, Width=0.031inch
C49: library part CMP-00043-2, "CAP CER 0.47UF 25V X7R 0603", Case Code (Imperial)=0603, Case Code (Metric)=1608, Dielectric=X7R, JLC_PN=C1623, Max Operating Temperature=125°C, Min Operating Temperature=-55°C, Package Quantity=1, Tolerance=10%, Voltage Rating=25V, Case/Package=0603, Construction=Flat, Depth=0.8mm, Height=0.8mm, Lead Free="Lead Free", Length=1.6mm, Mounting Technology="Surface Mount", Packaging="Tape and Reel", Radiation Hardening=No, RoHS Compliant=Yes, Series=CL, Thickness=0.035inch, Voltage Rating (DC)=25V, Width=0.031inch
D1 D4 D5 D6: library part CMP-00334-2, "LED Low-Power Uni-Color Red 630nm 2V 2-Pin Chip 0603(1608Metric) T/R", Case Code (Imperial)=0603, Case Code (Metric)=1608, Color=Red, Forward Current=30mA, Forward Voltage=2V, JLC_PN=C2286, Max Operating Temperature=85°C, Min Operating Temperature=-40°C, Package Quantity=1, Test Current=20mA, Case/Package=0603, Dominant Wavelength=625nm, Height=0.7mm, Length=1.6mm, Lens Style=Clear,Rectangular, Luminous Intensity=250mcd, Mount="Surface Mount", Packaging="Cut Tape", REACH SVHC=Unknown, RoHS Compliant=Yes, Viewing Angle=140°, Wavelength=625nm, Width=0.8mm
D2: library part CMP-00176-2, "LED BLUE CLEAR 0603 SMD", Case Code (Imperial)=0603, Case Code (Metric)=1608, Color=Blue, Forward Current=20mA, Forward Voltage=3.8V, JLC_PN=C72041, Lens Color=Colorless, Max Operating Temperature=80°C, Max Power Dissipation=75mW, Min Operating Temperature=-20°C, Package Quantity=1, Power Dissipation=76mW, Reverse Voltage=5V, Case/Package=0603, Depth=1.6mm, Dominant Wavelength=475nm, Height=0.55mm, Illumination Color=Blue, Lead Free="Lead Free", Length=0.8mm, Lens Style=Diffused,Colorless,Clear,Rectangular, Lens Transparency=Clear, Luminous Intensity=180mcd, Mount="Surface Mount", Mounting Technology="Surface Mount", Number of Elements=1, Number of LEDs=1, Number of Pins=2, Packaging="Tape and Reel", Pins=2, Radiation Hardening=No, RoHS Compliant=Yes, Test Current=20mA, Viewing Angle=130°, Wavelength=468nm, Width=0.8mm
D3: library part CMP-00493-2, "Led, Green, 520 Nm, 3.2 V, 30 Ma, 430 Mcd Rohs Compliant: Yes", Case Code (Imperial)=0603, Case Code (Metric)=1608, Color=Green, Forward Current=30mA, Forward Voltage=3.2V, JLC_PN=C72043, Lens Color=Colorless, Max Operating Temperature=85°C, Min Operating Temperature=-40°C, Package Quantity=1, Test Current=20mA, Case/Package=0603, Dominant Wavelength=520nm, Height=0.8mm, Lead Free="Lead Free", Length=1.6mm, Lens Size=0.7mm, Lens Style=Clear,Flat,Rectangular, Lens Transparency=Clear, Luminous Intensity=430mcd, Mount="Surface Mount", Mounting Technology="Surface Mount", Number of LEDs=1, Packaging="Cut Tape", Pins=2, Radiation Hardening=No, RoHS Compliant=Yes, Series=WL-SMCW, Viewing Angle=140°, Wavelength=520nm, Width=0.8mm
D7: library part CMP-00623-1, "SRV05 Series 4 Ch 3.5 pF 15 Vclamp Steering Diode/TVS Array Combo - SOT-23-6 USB ESD", Case/Package=SOT-23, Clamping Voltage=15V, JLC_PN=C85364, Leakage Current=5uA, Max Operating Temperature=150°C, Min Operating Temperature=-55°C, Peak Pulse Current=5A, Peak Pulse Power=500W, Reverse Breakdown Voltage=6V, Reverse Standoff Voltage=5V, Test Current=1mA, Clamping Voltage-Max=15V, Depth=1.75mm, Direction=Unidirectional, Lead Free="Lead Free", Length=3.05mm, Mounting Technology="Surface Mount", Number of Channels=4, Number of Elements=1, Packaging="Tape and Reel", Pins=6, Polarity=Unidirectional, Radiation Hardening=No, RoHS Compliant=Yes, Working Voltage=5V
D8: library part CMP-00627-1, "SCHOTTKY DIODE, 5A, 40V, SMC, FULL REEL; Diode Configuration:Single; Repetitive Reverse Voltage Vrrm Max:40V; Forward Current If(AV):5A; Diode Case Style:DO-214AB; No. of Pins:2Pins; Forward Voltage VF Max:550mV ;RoHS Compliant: Yes", Case/Package=SMC, Forward Current=5A, JLC_PN=C22452, Max Forward Surge Current (Ifsm)=150A, Max Operating Temperature=125°C, Max Repetitive Reverse Voltage (Vrrm)=40V, Min Operating Temperature=-55°C, Packaging="Cut Tape", Pins=2, Reach SVHC Compliant=No
FB1 FB2 FB3 FB4: library part CMP-00562-1, "Ferrite Beads Multi-Layer High Current 120Ohm 25% 100MHz 2A 0.05Ohm DCR 0603 T/R", Case Code (Imperial)=0603, Case Code (Metric)=1608, DC Resistance (DCR)=50mR, Max Current Rating=2A, Max Operating Temperature=105°C, Min Operating Temperature=-40°C, Package Quantity=4000, Case/Package=0603, Height=0.041inch, Length=0.063inch, Mounting Technology="Surface Mount", Number of Lines=1, Packaging="Cut Tape", Series=PFB, Width=0.031inch
HY1: library part CMP-00629-1, "Multilayer Directional Coupler for 698MHz to 2620MHz 6-Pin SMD", Case Code (Imperial)=0603, Case Code (Metric)=1608, Frequency=698MHz, Case/Package=0603, Insertion Loss=0.11dB, Packaging="Cut Tape", Return Loss=29dB, RoHS Compliant=Yes, Series=HHM
J1 J4: library part CMP-00439-1, "Conn Unshrouded Header HDR 8 POS 2.54mm Solder ST Thru-Hole Bag", Color=Black, Contact Resistance=20mR, Current Rating=4A, Flammability Rating="UL94 V-0", Max Operating Temperature=75°C, Max Voltage Rating (AC)=250V, Max Voltage Rating (DC)=250.25kV, Min Operating Temperature=0°C, Package Quantity=1, Connector Type="Male Pin", Contact Gender=Male, Contact Material=Brass,Bronze, Contact Mating Length=0.24inch, Contact Plating=Tin, Contact Type="Male Pin", Depth=2.49mm, Gender=Male, Glow Wire Compliant=Non-compliant, Housing Color=Black, Housing Material=Thermoplastic, Lead Free="Lead Free", Mount="Through Hole", Number of Circuits=8, Number of Contacts=8, Number of Positions=8, Number of Rows=1, Orientation=Straight, Packaging=Bulk, Pitch=2.54mm, Radiation Hardening=No, REACH SVHC=Unknown, RoHS Compliant=Yes, Series=42375, Termination=Solder, Voltage Rating=250V, Voltage Rating (DC)=250V
J2 J3: library part CMP-00157-4, "KK 254 Breakaway Header, Vertical, 2 Circuits, Tin (Sn) Plating, Mating Pin Length 6.09mm 2 POS", Color=Black, Contact Resistance=20mR, Current Rating=4A, Flammability Rating="UL94 V-0", Max Operating Temperature=75°C, Max Voltage Rating (AC)=250V, Min Operating Temperature=0°C, Package Quantity=1, Connector Type="Male Pin", Contact Material=Brass,Bronze, Contact Mating Length=0.24inch, Contact Plating=Tin, Contact Type="Male Pin", Depth=2.49mm, Gender=Male, Glow Wire Compliant=Non-compliant, Housing Color=Black, Housing Material=Nylon, Lead Free="Lead Free", Max Voltage Rating (DC)=250V, Mount="Through Hole", Mounting Technology="Through Hole", Number of Circuits=2, Number of Contacts=2, Number of Positions=2, Number of Rows=1, Orientation=Straight, Packaging=Bulk, Pitch=2.54mm, Radiation Hardening=No, REACH SVHC=Unknown, Series="KK® 42375", Termination=Solder, Voltage Rating=250V, Voltage Rating (DC)=250V
J5: library part CMP-00377-4, "SMA Connector Jack, Female Socket 50 Ohm Board Edge, End Launch Solder", Case/Package=SMA, Dielectric Material=PTFE, Frequency=12.4GHz, Housing Color=Gold, Insulation Resistance=5GR, Package Quantity=100, Voltage Rating=335V, Body Material=Brass, Body Plating=Gold, Center Contact Plating=Gold, Connector Type=SMA, Contact Material=Brass, Contact Plating=Gold, Fastening Type=Threaded, Impedance=50R, Max Frequency=12.4GHz, Mount=Edge,Board, Number of Ports=1, Orientation=Straight, Packaging=Tray, Plating=Gold, Polarity=Standard, Series=-, Termination=Solder, Weight=0.070548oz
J6: library part CMP-00616-2, "Conn USB 2.0 Type C RCP 24 POS 0.3mm/0.5mm Solder RA SMD 24 Terminal 1 Port T/R", Flammability Rating="UL94 V-0", Insulation Color=Black, Max Operating Temperature=85°C, Min Operating Temperature=-40°C, Connector Type=USB, Contact Plating=Gold, Gender=Receptacle, Mating Cycles=10000, Mounting Technology="Surface Mount,Through Hole,Horizontal", Number of Ports=1, Series=USB4105, Shielding=Shielded, Termination=Solder
J7: library part CMP-00188-2, "Conn Unshrouded Header HDR 3 POS 2.54mm Solder ST Thru-Hole Poly Bag"
JP1 JP2 JP3 JP4 JP5 JP6 JP7 JP8 JP9 JP10 JP11 JP12: library part CMP-00415-4, "RC Series 0603 0.1 W 0 Ohm Jumper Surface Mount Thick Film Chip Resistor", Case Code (Imperial)=0603, Case Code (Metric)=1608, Current Rating=1A, JLC_PN=C21189, Max Operating Temperature=155°C, Max Power Dissipation=100mW, Min Operating Temperature=-55°C, Package Quantity=5000, Resistance=0mR, Resistance Tolerance=1%, Resistor Type="Thick Film", Temperature Coefficient=200ppm/°C, Voltage Rating=50V, Working Voltage=75V, Case/Package=0603, Construction=Rectangular, Contact Plating=Tin,Matte, Depth=0.8mm, Features="Moisture Resistant", Height=0.45mm, Lead Free="Lead Free", Length=1.6mm, Military Standard=Not, Number of Pins=2, Number of Terminations=2, Packaging="Tape and Reel", Power Rating=100mW, Radiation Hardening=No, REACH SVHC="No SVHC", RoHS Compliant=Yes, Series=RC, Technology="THICK FILM", Termination=SMD/SMT, Tolerance=1%, Voltage Rating (DC)=50V, Width=0.8mm
L1: library part CMP-00609-1, "Inductor Power Shielded Multi-Layer 15uH 20% 2MHz Ferrite 0.25A 1.235Ohm DCR 0805 T/R", Case Code (Imperial)=0805, Case Code (Metric)=2012, DC Resistance (DCR)=950mR, Max Operating Temperature=125°C, Min Operating Temperature=-55°C, Saturation Current=120mA, Self Resonant Frequency=40MHz, Test Frequency=2MHz, Tolerance=20%, Case/Package=0805, Core Material=Ferrite, Mounting Technology="Surface Mount", Packaging="Cut Tape", RoHS Compliant=Yes, Series=MLZ, Shielding=Shielded
Q1: library part CMP-00628-1, "Trans Mosfet P-ch 20V 3.1A 3-PIN SOT-23 T/r / Mosfet P-ch 20V 3.1A SOT23-3", Case/Package=SOT-23, Continuous Drain Current (ID)=2.3A, Drain to Source Resistance=112mR, Drain to Source Voltage (Vdss)=-20V, Gate to Source Voltage (Vgs)=8V, Input Capacitance=405pF, JLC_PN=C10487, Max Operating Temperature=150°C, Max Power Dissipation=1.6W, Min Operating Temperature=-55°C, Package Quantity=3000, Power Dissipation=860mW, Threshold Voltage=-400mV, Drain-source On Resistance-Max=112mR, Fall Time=35ns, Height=1.02mm, Lead Free="Lead Free", Length=3.04mm, Mounting Technology="Surface Mount", Nominal Vgs=-400mV, Number of Channels=1, Number of Elements=1, Packaging="Tape and Reel", Pins=3, Polarity=P-CHANNEL, Radiation Hardening=No, Rds On Max=112mR, Reach SVHC Compliant=Unknown, Rise Time=35ns, RoHS Compliant=Yes, Series=TrenchFET®, Turn-Off Delay Time=30ns, Turn-On Delay Time=11ns, Weight=0.050717oz, Width=1.4mm
R1 R5 R6 R7 R9: library part CMP-00167-4, "Res Thick Film 0603 1K Ohm 1% 1/10W ±100ppm/°C Molded SMD SMD Paper T/R", Case Code (Imperial)=0603, Case Code (Metric)=1608, JLC_PN=C21190, Max Operating Temperature=155°C, Max Power Dissipation=100mW, Min Operating Temperature=-55°C, Resistance=1kR, Resistance Tolerance=1%, Resistor Type="Thick Film", Temperature Coefficient=100ppm/°C, Voltage Rating=50V, Case/Package=0603, Construction=Rectangular, Contact Plating=Tin,Matte, Depth=0.8mm, Features="Moisture Resistant", Height=0.45mm, Lead Free="Lead Free", Length=1.6mm, Military Standard=Not, Number of Terminations=2, Packaging="Tape and Reel", Power Rating=100mW, Radiation Hardening=No, REACH SVHC="No SVHC", RoHS Compliant=Yes, Series=RC, Size Code=0603, Technology="THICK FILM", Termination=SMD/SMT, Tolerance=1%
R2 R16: library part CMP-00345-2, "RES SMD 100K OHM 1% 1/10W 0603", Case Code (Imperial)=0603, Case Code (Metric)=1608, JLC_PN=C25803, Max Operating Temperature=155°C, Max Power Dissipation=100mW, Min Operating Temperature=-55°C, Resistance=100kR, Resistance Tolerance=1%, Resistor Type="Thick Film", Temperature Coefficient=100ppm/°C, Voltage Rating=50V, Working Voltage=75V, Case/Package=0603, Construction=Rectangular, Depth=0.8mm, Features="Moisture Resistant", Height=0.45mm, Lead Free="Lead Free", Length=1.6mm, Military Standard=Not, Number of Pins=2, Number of Terminations=2, Packaging="Tape and Reel", Pins=2, Power Rating=100mW, REACH SVHC="No SVHC", Reach SVHC Compliant=No, RoHS Compliant=Yes, Series=RC, Technology="THICK FILM", Termination=SMD/SMT, Tolerance=1%, Voltage Rating (DC)=50V, Width=0.8mm
R3: library part CMP-00602-2, "Res Thick Film 0603 33 Ohm 1% 1/10W ±100ppm/°C Molded SMD Paper T/R", Case Code (Imperial)=0603, Case Code (Metric)=1608, Case/Package=Molded, JLC_PN=C23140, Max Operating Temperature=155°C, Max Power Dissipation=100mW, Min Operating Temperature=-55°C, Package Quantity=10, Ratings=AEC-Q200, Resistance Tolerance=1%, Resistor Type="Thick Film", Temperature Coefficient=100ppm/°C, Voltage Rating=75V, Construction=Rectangular, Contact Plating=Tin, Depth=0.85mm, Features="Automotive AEC-Q200", Height=0.45mm, Lead Free="Lead Free", Length=1.55mm, Military Standard=Not, Mounting Technology="Surface Mount", Number of Terminations=2, Packaging="Tape and Reel", Power Rating=100mW, Radiation Hardening=No, Series=CRCW, Technology="THICK FILM", Termination=Wraparound, Tolerance=1%, Voltage Rating (DC)=75V, Weight=7.1E-05oz, Width=0.033inch
R4: library part CMP-009-000009-3, "4.7kO 1% 0603 thick film", Case Code (Imperial)=0603, Case Code (Metric)=1608, JLC_PN=C23162, Max Operating Temperature=155°C, Max Power Dissipation=100mW, Min Operating Temperature=-55°C, Package Quantity=5000, Ratings=AEC-Q200, Resistance=4.7k, Resistor Type="Thick Film", Temperature Coefficient=100ppm/°C, Tolerance=1%, Voltage Rating=75V, Case/Package=0603, Component Type=Standard, Contact Plating=Tin, Depth=0.85mm, Design Item ID=CRCW06034K70FKEAC, Features="Automotive AEC-Q200", Height=0.45mm, Lead Free="Lead Free", Length=1.55mm, Military Standard=Not, Mounting Technology="Surface Mount", Number of Terminations=2, Packaging="Cut Tape", Pin Count=2, Power Rating=100mW, Series=CRCW, Source=BMS_LIB.SchLib, Technology="THICK FILM", Termination=SMD/SMT, Voltage Rating (DC)=75V, Weight=7.1E-05oz, Width=0.85mm
R8: library part CMP-00553-3, "Res Thick Film 0603 1.5K Ohm 5% 0.1W(1/10W) ±200ppm/C Pad SMD Automotive T/R", Case Code (Imperial)=0603, Case Code (Metric)=1608, JLC_PN=C22843, Max Operating Temperature=155°C, Min Operating Temperature=-55°C, Package Quantity=5000, Power Rating=100mW, Resistance Tolerance=5%, Resistor Type="Thick Film", Temperature Coefficient=200ppm/°C, Voltage Rating=50V, Case/Package=0603, Construction=Rectangular, Depth=0.8mm, Height=0.45mm, Lead Free="Lead Free", Length=1.6mm, Military Standard=Not, Mounting Technology="Surface Mount", Packaging="Tape and Reel", Pins=2, Reach SVHC Compliant=Yes, Series=RK73B, Technology="THICK FILM", Termination=SMD/SMT, Tolerance=5%, Voltage Rating (DC)=50V, Width=0.8mm
R10 R11: library part CMP-00625-1, "22R 1/16W %1 0402", Operating Temperature Range=-55℃~+155℃, Overload Voltage (Max)=50V, Power(Watts)=62.5mW, Resistance=22R, Temperature Coefficient=±200ppm/℃, Tolerance=±1%, Type="Thick Film Resistors"
R12: library part CMP-00218-1, "Bourns 3362P-1-254LF THT Trimpot, 250k, 10%, 1 Turn", Max Operating Temperature=125°C, Max Power Dissipation=500mW, Min Operating Temperature=-55°C, Package Quantity=250, Resistance=250kR, Resistance Tolerance=10%, Resistor Type=Cermet, Temperature Coefficient=100ppm/°C, Depth=6.99mm, Height=0.185inch, Length=6.6mm, Military Standard=Not, Mount="Through Hole", Number of Turns=1, Packaging=Rail/Tube, Power Rating=500mW, Radiation Hardening=No, REACH SVHC="No SVHC", RoHS Compliant=Yes, Series="Trimpot® 3362 - Sealed", Taper=Linear, Technology=CERMET, Termination=Pin, Tolerance=10%, Weight=0.02oz, Width=6.6mm
R13: library part CMP-00611-1, "Res Thick Film 0402 220 Ohm 5% 1/16W ±100ppm/°C Molded SMD SMD Paper T/R", Case/Package=0402, JLC_PN=C25091, Max Operating Temperature=155°C, Min Operating Temperature=-55°C, Temperature Coefficient=100ppm/°C, Tolerance=5%, Contact Plating=Tin,Matte, RoHS Compliant=Yes
R14: library part CMP-00040-1, "RES SMD 100 OHM 1% 1/10W 0603", Case/Package=0603, Power Rating=100mW, Resistance=100R, Tolerance=1%, Lead Free="Lead Free"
R15: library part CMP-00042-5, "VISHAY - CRCW060310K0FKEA - SMD Chip Resistor, 0603 [1608 Metric], 10 kohm, CRCW e3 Series, 75 V, Thick Film, 100 mW", Case Code (Imperial)=0603, Case Code (Metric)=1608, JLC_PN=C25804, Max Operating Temperature=155°C, Max Power Dissipation=100mW, Min Operating Temperature=-55°C, Package Quantity=10, Resistance=10kR, Temperature Coefficient=100ppm/°C, Tolerance=1%, Voltage Rating=75V, Case/Package=0603, Composition="Thick Film", Contact Plating=Tin,Lead, Depth=0.85mm, Features="Automotive AEC-Q200", Height=0.45mm, Lead Free="Lead Free", Length=1.55mm, Military Standard=Not, Number of Pins=2, Number of Terminations=2, Packaging="Tape and Reel", Power Rating=100mW, Radiation Hardening=No, REACH SVHC=Unknown, Termination=SMD/SMT, Voltage Rating (DC)=75V, Weight=7.1E-05oz, Width=0.033inch
R17: library part CMP-00343-3, "Res Thick Film 0603 47K Ohm 1% 1/10W ±100ppm/°C Molded SMD Punched Carrier T/R", Case Code (Imperial)=0603, Case Code (Metric)=1608, JLC_PN=C25819, Max Operating Temperature=155°C, Max Power Dissipation=100mW, Min Operating Temperature=-55°C, Package Quantity=5000, Resistance Tolerance=1%, Resistor Type="Thick Film", Temperature Coefficient=100ppm/°C, Voltage Rating=75V, Working Voltage=6V, Case/Package=0603, Construction=Rectangular, Contact Plating=Tin, Depth=0.8mm, Features="Automotive AEC-Q200", Height=0.45mm, Lead Free="Lead Free", Length=1.6mm, Military Standard=Not, Mount="Surface Mount", Number of Pins=2, Number of Terminations=2, Packaging="Tape and Reel", Power Rating=100mW, Radiation Hardening=No, REACH SVHC="No SVHC", RoHS Compliant=Yes, Series=ERJ, Technology="THICK FILM", Termination=SMD/SMT, Tolerance=1%, Voltage Rating (DC)=75V, Width=0.8mm
R18: library part CMP-00498-3, "Res Thick Film 0402 10 Ohm 5% 1/5W ±200ppm/°C Molded SMD Punched Paper T/R", Case Code (Imperial)=0402, Case Code (Metric)=1005, JLC_PN=C25077, Max Operating Temperature=155°C, Max Power Dissipation=200mW, Min Operating Temperature=-55°C, Resistance=10R, Resistor Type="Thick Film", Temperature Coefficient=200ppm/°C, Tolerance=5%, Case/Package=0402, Features="Automotive AEC-Q200", Height=0.016inch, Length=0.039inch, Number of Terminations=2, Packaging="Cut Tape", Series=ERJ, Width=0.02inch
R19: library part CMP-00405-2, "Res Thick Film 0603 8.2K Ohm 5% 1/10W ±200ppm/°C Molded SMD Paper T/R", Case/Package=0603, JLC_PN=C25981, Power Rating=100mW, Resistance=8.2kR, Tolerance=5%, Lead Free="Lead Free", RoHS Compliant=Yes
R20 R21: library part CMP-00220-2, "Res Thick Film 0603 5.1K Ohm 1% 1/10W ±100ppm/°C Molded SMD SMD Paper T/R", Case Code (Imperial)=0603, Case Code (Metric)=1608, JLC_PN=C23186, Max Operating Temperature=155°C, Max Power Dissipation=100mW, Min Operating Temperature=-55°C, Package Quantity=5000, Resistance Tolerance=1%, Resistor Type="Thick Film", Temperature Coefficient=100ppm/°C, Voltage Rating=75V, Case/Package=0603, Construction=Rectangular, Contact Plating=Tin, Depth=0.85mm, Features="Automotive AEC-Q200", Height=0.45mm, Lead Free="Lead Free", Length=1.55mm, Military Standard=Not, Number of Terminations=2, Packaging="Tape and Reel", Power Rating=100mW, Radiation Hardening=No, Reach SVHC Compliant=Unknown, RoHS Compliant=Yes, Series=CRCW, Technology="THICK FILM", Termination=SMD/SMT, Tolerance=1%, Voltage Rating (DC)=75V, Weight=7.1E-05oz, Width=0.85mm
SW1 SW2 SW3: library part CMP-00387-4, "Switch Tactile N.O. SPST Round Button Gull Wing 0.05A 12VDC 100000Cycles 1.57N SMD T/R", Current Rating=50mA, Max Voltage Rating (DC)=12V, Operating Force=160gf, Package Quantity=3000, Actuator Length=0.3mm, Actuator Material=Polyphenylene, Actuator Type=Standard, Contact Material=Silver, Contact Plating=Silver, Electrical Life=100000Cycles, Illumination Type=Non-Illuminated, Mechanical Life=100000Cycles, Mount="Surface Mount", Orientation=Straight, Packaging="Tape and Reel", RoHS Compliant=Yes, Series=TL3342, Size=5.2mm, Switch Function=Off-Mom, Termination="Gull Wing", Throw Configuration=SPST, Voltage Rating (DC)=12V
U1: library part CMP-00608-3, "Microcontroller 32-Bit Arm Cortex-M4 RISC 128Kbyte 1.8V to 3.6V 48-Pin UFQFPN Industrial", Manufacturer=STMicroelectronics, Maximum Clock Frequency="48 MHz", Maximum Operating Temperature="+ 105 C", Minimum Operating Temperature="- 40 C", Operating Supply Voltage="1.8 V to 3.6 V", Package / Case=UFQFPN-48, Supply Voltage - Max="3.6 V", Supply Voltage - Min="1.8 V", ADC Resolution="12 bit", Brand=STMicroelectronics, Core="ARM Cortex M4", Data Bus Width="32 bit", Data RAM Size="64 kB", Data RAM Type=RAM, Interface Type=I2C, Moisture Sensitive=Yes, Mounting Style=SMD/SMT, Number of I/Os="43 I/O", Packaging=Tray, Product Category="RF Microcontrollers - MCU", Product Type="RF Microcontrollers - MCU", Program Memory Size="128 kB", Program Memory Type=Flash, Series=STM32WL, Subcategory="Wireless & RF Integrated Circuits", Technology=Si, Tradename=STM32
U2: library part CMP-00174-3, "Transceiver 2Mbps USB 2.0 MSOP-10 USB ICs ROHS", JLC_PN=C99652, ComponentLink1Description=datasheet, ComponentLink1URL=https://www.mpja.com/download/35227cpdata.pdf
U4: library part CMP-00620-1, "Semtech SX1261 SX1262 Balun Filt", Frequency="900 MHz", Frequency Range="862 MHz to 928 MHz", Manufacturer=Johanson, Maximum Operating Temperature="+ 85 C", Minimum Operating Temperature="- 40 C", Voltage Rating="5 V", Brand="Johanson Technology", Impedance="50 Ohms", Insertion Loss="1.4 dB", Mounting="PCB Mount", Product=Filters, Product Category="Signal Conditioning", Product Type="Signal Conditioning", Subcategory=Filters, Termination Style=SMD/SMT, Type="Impedance-Matched Filter"
U5: library part CMP-00070-3, "Skyworks 900 MHz front end module 30.5 dBm", Case/Package=SMD/SMT, Frequency=930MHz, Packaging="Tape and Reel", RoHS Compliant=Yes, Series=-
U6: library part CMP-00630-1, "RF Detector 450MHz to 2000MHz 15dBm 6-Pin WSON EP T/R", Frequency=450MHz, Operating Supply Current=8mA, Operating Supply Voltage=5V, Package Quantity=1000, Lead Free="Lead Free", Length=2.5mm, Packaging="Tape and Reel", Pins=6, Radiation Hardening=No, RoHS Compliant=Yes, Series=LMV228, Thickness=800um, Width=2.2mm